# Altium PCB PCB.PcbDoc (part 3 of 3)
Units mm, origin at the board's own origin, x right, y up, seen from the top; angles counter-clockwise.
Board outline 58.5 x 91.95 mm, 2 copper layers (Top Layer, Bottom Layer), stack 1.571 mm thick; 57 components, 46 nets, 183 pads, 18 vias.
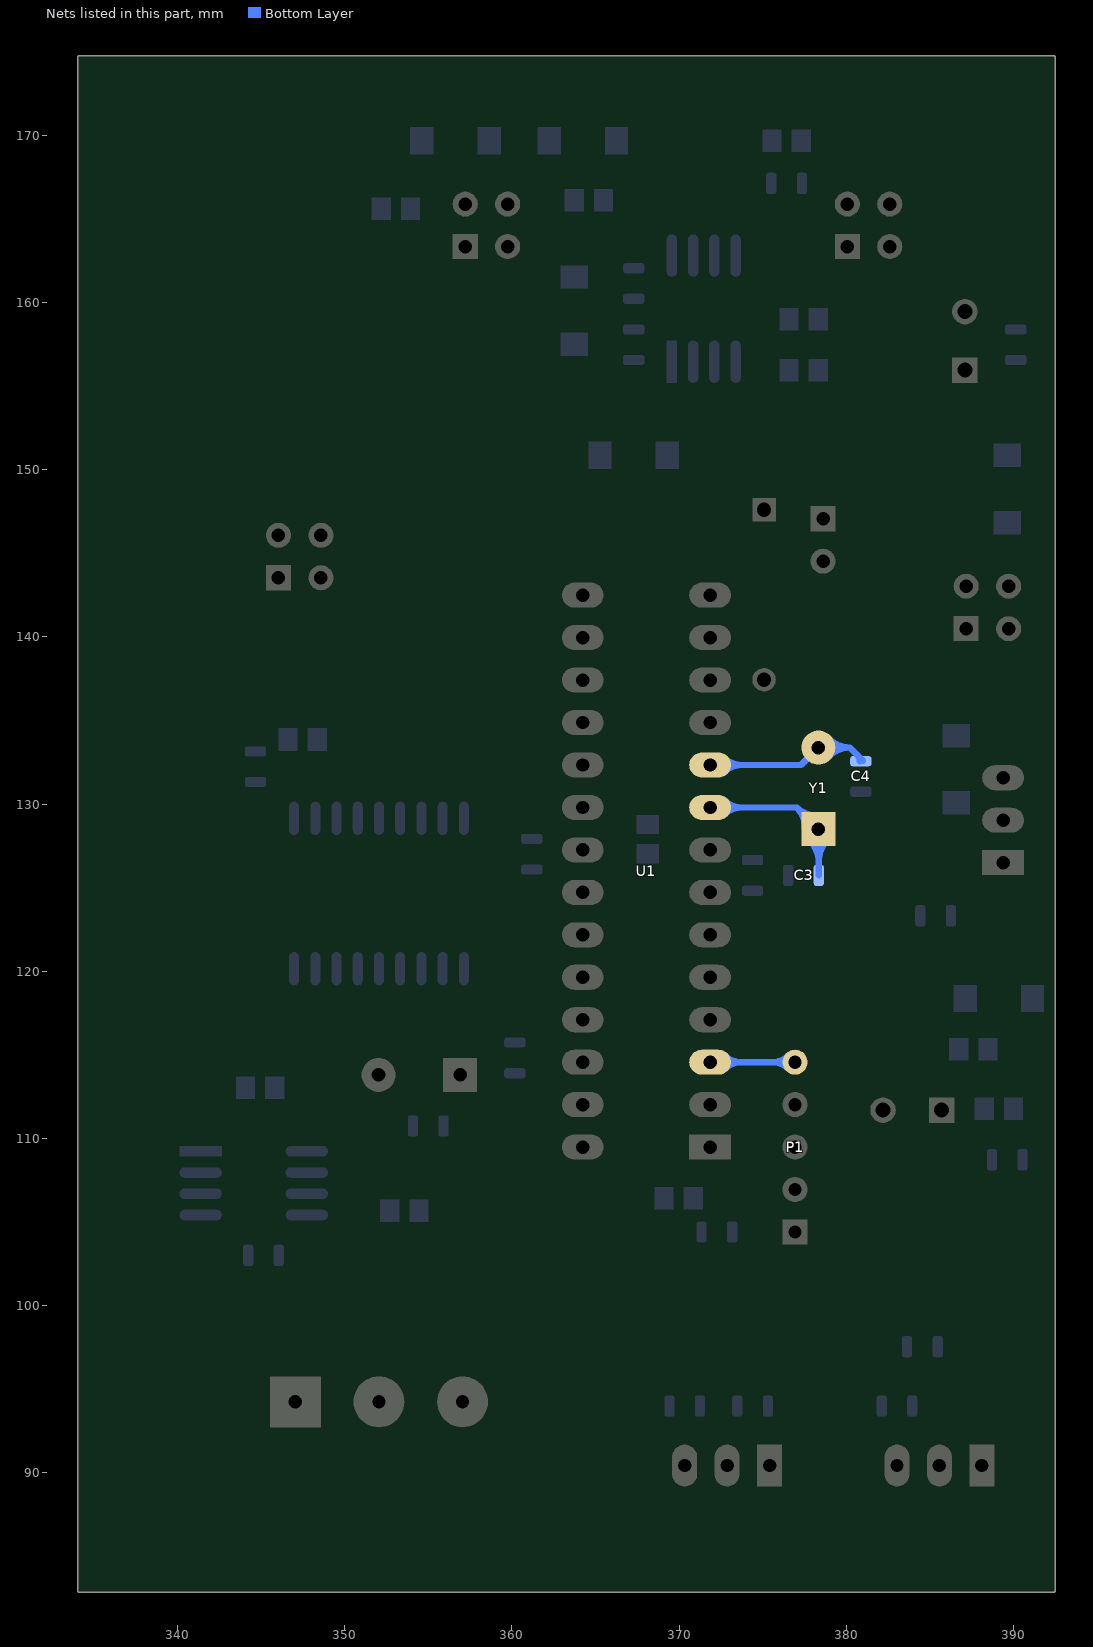
[diagram p3: the nets of this part, all layers, seen from the top]

## Via types
v1: diameter 1.5, hole 0.8, Top Layer to Bottom Layer, 17 vias
v2: diameter 1.2, hole 0.6, Top Layer to Bottom Layer, 1 vias

## Nets (pads, with @x,y where several pads share a name; then routed paths per layer and width w, separated by ;. In a path a pad name is that pad's centre, name@x,y a point inside that pad or via, vN(x,y) a via of type N, cw(c..) or ccw(c..) an arc to the next point about the centre after c; other vN are vias at no path point) (continued)
USART_TX: P1.5 U1.3 | length 22.1
  Bottom Layer w0.381: U1.3@371.856,114.554 P1.5@376.936,114.554 ; U1.3@372.752,114.158 cw(c373.707,113.203) 373.707,114.554 ; U1.3@372.752,114.158 cw(c373.707,113.203) 373.707,114.554 ; U1.3@372.752,114.158 cw(c373.707,113.203) 373.707,114.554 ; U1.3@372.752,114.158 cw(c373.707,113.203) 373.707,114.554 ; U1.3@372.752,114.95 ccw(c373.707,115.905) 373.707,114.554 ; U1.3@372.752,114.95 ccw(c373.707,115.905) 373.707,114.554 ; U1.3@372.752,114.95 ccw(c373.707,115.905) 373.707,114.554 ; U1.3@372.752,114.95 ccw(c373.707,115.905) 373.707,114.554 ; 375.585,114.554 cw(c375.585,113.203) P1.5@376.54,114.158 ; 375.585,114.554 ccw(c375.585,115.905) P1.5@376.54,114.95 ; 375.585,114.554 cw(c375.585,113.203) P1.5@376.54,114.158 ; 375.585,114.554 ccw(c375.585,115.905) P1.5@376.54,114.95 ; 375.585,114.554 cw(c375.585,113.203) P1.5@376.54,114.158 ; 375.585,114.554 ccw(c375.585,115.905) P1.5@376.54,114.95 ; 375.585,114.554 cw(c375.585,113.203) P1.5@376.54,114.158 ; 375.585,114.554 ccw(c375.585,115.905) P1.5@376.54,114.95
XTAL1: C3.2 U1.9 Y1.1 | length 45.4
  Bottom Layer w0.381: U1.9@371.856,129.794 377.036,129.794 ; Y1.1@378.333,128.497 377.036,129.794 ; C3.2@378.358,125.73 Y1.1@378.358,128.472 ; U1.9@372.752,129.398 cw(c373.707,128.443) 373.707,129.794 ; U1.9@372.752,129.398 cw(c373.707,128.443) 373.707,129.794 ; U1.9@372.752,129.398 cw(c373.707,128.443) 373.707,129.794 ; U1.9@372.752,129.398 cw(c373.707,128.443) 373.707,129.794 ; U1.9@372.752,130.19 ccw(c373.707,131.145) 373.707,129.794 ; U1.9@372.752,130.19 ccw(c373.707,131.145) 373.707,129.794 ; U1.9@372.752,130.19 ccw(c373.707,131.145) 373.707,129.794 ; U1.9@372.752,130.19 ccw(c373.707,131.145) 373.707,129.794 ; 377.036,129.794 cw(c375.887,128.645) Y1.1@377.509,128.547 ; 377.036,129.794 ccw(c378.185,130.943) Y1.1@378.283,129.321 ; 377.036,129.794 cw(c375.887,128.645) Y1.1@377.509,128.547 ; 377.036,129.794 ccw(c378.185,130.943) Y1.1@378.283,129.321 ; 377.036,129.794 cw(c375.887,128.645) Y1.1@377.509,128.547 ; 377.036,129.794 ccw(c378.185,130.943) Y1.1@378.283,129.321 ; 377.036,129.794 cw(c375.887,128.645) Y1.1@377.509,128.547 ; 377.036,129.794 ccw(c378.185,130.943) Y1.1@378.283,129.321 ; Y1.1@377.749,127.913 cw(c376.279,126.443) 378.358,126.443 ; Y1.1@377.749,127.913 cw(c376.279,126.443) 378.358,126.443 ; Y1.1@377.749,127.913 cw(c376.279,126.443) 378.358,126.443 ; Y1.1@377.749,127.913 cw(c376.279,126.443) 378.358,126.443 ; Y1.1@378.019,128.183 cw(c377.199,127.363) 378.358,127.363 ; Y1.1@378.019,128.183 cw(c377.199,127.363) 378.358,127.363 ; Y1.1@378.019,128.183 cw(c377.199,127.363) 378.358,127.363 ; Y1.1@378.019,128.183 cw(c377.199,127.363) 378.358,127.363 ; 378.358,126.565 cw(c380.265,126.565) Y1.1@378.917,127.913 ; 378.358,126.565 cw(c380.265,126.565) Y1.1@378.917,127.913 ; 378.358,126.565 cw(c380.265,126.565) Y1.1@378.917,127.913 ; 378.358,126.565 cw(c380.265,126.565) Y1.1@378.917,127.913
XTAL2: C4.2 U1.10 Y1.2 | length 31.4
  Bottom Layer w0.381: U1.10@371.856,132.334 377.29,132.334 Y1.2@378.333,133.377 380.211,133.377 ; C4.2@381,132.588 380.211,133.377 ; U1.10@372.752,131.938 cw(c373.707,130.983) 373.707,132.334 ; U1.10@372.752,131.938 cw(c373.707,130.983) 373.707,132.334 ; U1.10@372.752,131.938 cw(c373.707,130.983) 373.707,132.334 ; U1.10@372.752,131.938 cw(c373.707,130.983) 373.707,132.334 ; U1.10@372.752,132.73 ccw(c373.707,133.685) 373.707,132.334 ; U1.10@372.752,132.73 ccw(c373.707,133.685) 373.707,132.334 ; U1.10@372.752,132.73 ccw(c373.707,133.685) 373.707,132.334 ; U1.10@372.752,132.73 ccw(c373.707,133.685) 373.707,132.334 ; Y1.2@378.941,132.819 cw(c380.211,131.654) 380.211,133.377 ; Y1.2@378.941,132.819 cw(c380.211,131.654) 380.211,133.377 ; Y1.2@378.941,132.819 cw(c380.211,131.654) 380.211,133.377 ; Y1.2@378.941,132.819 cw(c380.211,131.654) 380.211,133.377 ; Y1.2@378.941,133.935 ccw(c380.211,135.1) 380.211,133.377 ; Y1.2@378.941,133.935 ccw(c380.211,135.1) 380.211,133.377 ; Y1.2@378.941,133.935 ccw(c380.211,135.1) 380.211,133.377 ; Y1.2@378.941,133.935 ccw(c380.211,135.1) 380.211,133.377 ; 380.657,132.931 cw(c380.288,132.563) C4.2@380.809,132.563 ; 380.657,132.931 cw(c380.288,132.563) C4.2@380.809,132.563 ; 380.657,132.931 cw(c380.288,132.563) C4.2@380.809,132.563 ; 380.657,132.931 cw(c380.288,132.563) C4.2@380.809,132.563
pads on no net: P1.3 U1.21 U1.28 U2.3 U2.4 U2.5 U2.6 U2.10 U2.11 U3.5

## Polygon pours and split planes (outlines as drawn)
SOURCE on Bottom Layer "Bottom Layer-No Net" (solid, remove dead copper, pour order 1000): 334.01,174.777 392.476,174.777 392.476,82.829 392.349,82.677 392.476,82.829 334.01,82.829

## Other copper
Bottom Layer:
  rectangle net SOURCE: 378.714,161.925 383.921,167.259
  region net GATE: 353.568,165.1 356.108,162.56 361.188,162.56 364.236,165.608 364.236,168.656 362.712,170.18 358.648,170.18 358.648,169.672 355.092,166.116 353.568,166.116
  region net DRAIN: 346.027,146.076 351.843,151.892 355.6,155.448 362.204,155.448 365.76,151.892 365.76,151.384 354.584,140.208 349.355,140.208 346.027,143.536
  region net +VBAT: 387.096,144.78 389.636,147.32 390.144,146.812 390.144,140.208 387.096,140.208

## Silkscreen, mask and mechanical layers (free items; w line width, h text height)
Top Overlay:
  text "T" at 373.863,113.792 h1.52
  text "R" at 373.863,111.252 h1.52
  text "0" at 373.863,106.172 h1.52
  text "gnd" at 346.558,88.595 h1.52 r270
  text "Low" at 351.257,88.595 h1.52 r270
  text "High" at 356.311,88.57 h1.52 r270
Mechanical 1:
  lines w0.254: 392.382,82.957 334.137,82.957 334.137,174.651 392.382,174.651 392.382,83.058

## Text inside footprints (layer, text, board x,y; h text height)
C10: Top Overlay "+" at 386.08,155.448 h1.5 r90; Top Overlay "-" at 386.08,159.004 h1.5 r90
C11: Top Overlay "+" at 386.207,110.668 h1.5 r180; Top Overlay "-" at 382.651,110.668 h1.5 r180
P3: Top Overlay "1" at 385.143,139.98 h1.27; Top Overlay "2" at 384.635,142.52 h1.27; Top Overlay "4" at 391.239,142.52 h1.27; Top Overlay "3" at 391.239,139.98 h1.27
P5: Top Overlay "1" at 343.995,143.028 h1.27; Top Overlay "2" at 343.487,145.568 h1.27; Top Overlay "4" at 350.091,145.568 h1.27; Top Overlay "3" at 350.091,143.028 h1.27
P6: Top Overlay "1" at 355.171,162.84 h1.27; Top Overlay "2" at 354.663,165.38 h1.27; Top Overlay "4" at 361.267,165.38 h1.27; Top Overlay "3" at 361.267,162.84 h1.27
P7: Top Overlay "1" at 378.031,162.84 h1.27; Top Overlay "2" at 377.523,165.38 h1.27; Top Overlay "4" at 384.127,165.38 h1.27; Top Overlay "3" at 384.127,162.84 h1.27